# Altium PCB 60Pin_120Pin.PCBDOC
Units mm, origin at the board's own origin, x right, y up, seen from the top; angles counter-clockwise.
Board outline 10 x 54 mm, 2 copper layers (Top Layer, Bottom Layer), stack 1.621 mm thick; 3 components, 34 nets, 184 pads, 54 vias.
Unrouted connection lines stored in the file: 7.
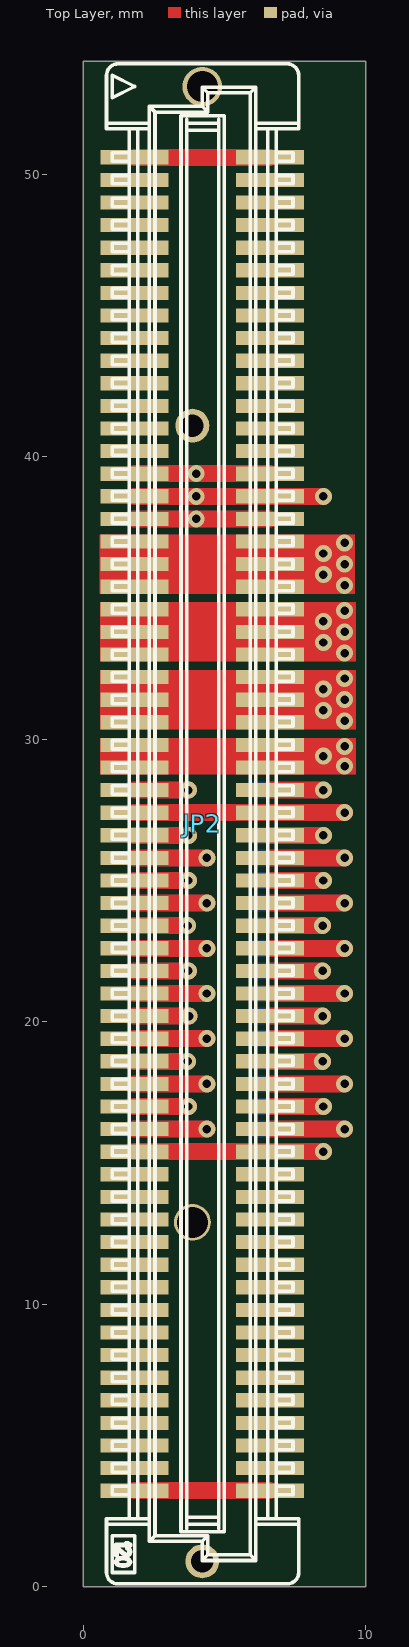
[diagram p0: Top Layer view]
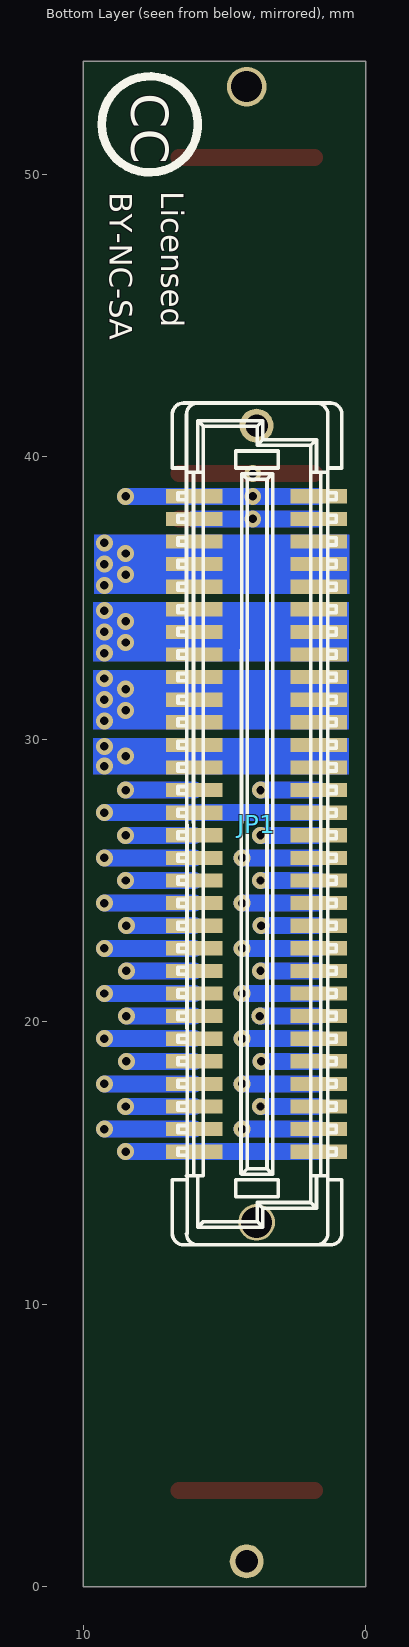
[diagram p1: Bottom Layer view, seen from below]

## Layer stack, top to bottom
Top Layer: signal copper 0.0356
Dielectric: core 1.55, FR-4, Dk 4.8
Bottom Layer: signal copper 0.0356

## Board outline
0,0 10,0 10,54 0,54

## Design rules (kind name [scope] priority, off if disabled: settings)
Clearance [All] p1: gap=0.2
ComponentClearance ComponentClearance_Bottom [OnLayer('Bottom Layer') vs OnLayer('Bottom Layer')] p1: gap=0.254 collisioncheckmode=3 verticalgap=0.254
ComponentClearance ComponentClearance_Top [OnLayer('Top Layer') vs OnLayer('Top Layer')] p2: gap=0.254 collisioncheckmode=3 verticalgap=0.254
PolygonConnect [All] p1: connectstyle=Relief reliefconductorwidth=0.254 reliefentries=4 polygonreliefangle="90 Angle"
RoomDefinition 60Pin_120Pin [InComponentClass('60Pin_120Pin')] p1 off: confinementstyle=ConfineIn formatcopy=TRUE lockcomponents=FALSE outline -50.8,-76.2 0,-76.2 0,-50.8 -50.8,-50.8
RoutingVias [All] p1: holewidth=0.3 width=0.6 viastyle="Through Hole" minholewidth=0.3 minwidth=0.6 maxholewidth=0.8 maxwidth=1.6
SolderMaskExpansion [All] p1: expansion=0.102
TestPointUsage [All] p1: valid=0 allowmultiple=FALSE
Testpoint [All] p1: side=15 testpointundercomponent=TRUE minsize=1.016 maxsize=2.54 preferedsize=1.524 minholesize=0 maxholesize=1.016 preferedholesize=0.813 testpointgrid=0.025 style=1023 order=0-112345678
Width [All] p1: maxlimit=1 minlimit=0.6 preferedwidth=0.6
18 further rules are at their usual default settings.

## Components (designator, comment, footprint, x,y, rotation, side; value= is the part's Value field where it differs from the comment)
JP1 "AMP-FH-60-Plug" AMP_FH_.8MM_60PIN_PLUG 3.865,27 r270 bottom locked
JP2 "AMP-FH-120-RECEPTABLE-H5" AMP_FH_.8MM_120PIN_R_H9_H13 4.215,27 r270 top locked
? "CC License" CC-License 7.62,51.816 r270 bottom

## Footprints (in the part's own frame and the unit in brackets; to place one, negate y for a bottom-side part, rotate by r counter-clockwise, add the part's x,y. Pads: shape width x height; smd on the part's side, far side on the other; paste and mask are expansions set on the pad)
AMP_FH_.8MM_60PIN_PLUG [mm] "AMP Free Height System, 0.8mm, 60 Pin, all Heights, Plug"
  round 1.2 hole 0.8: 0(-14.1,0)
  round 1.3 hole 1.1 mask+0: 0(14.1,0)
  rect 0.5x2 smd: 1(-11.6,2.2) 2(-11.6,-2.2) 3(-10.8,2.2) 4(-10.8,-2.2) 5(-10,2.2) 6(-10,-2.2) 7(-9.2,2.2) 8(-9.2,-2.2) 9(-8.4,2.2) 10(-8.4,-2.2) 11(-7.6,2.2) 12(-7.6,-2.2) 13(-6.8,2.2) 14(-6.8,-2.2) 15(-6,2.2) 16(-6,-2.2) 17(-5.2,2.2) 18(-5.2,-2.2) 19(-4.4,2.2) 20(-4.4,-2.2) 21(-3.6,2.2) 22(-3.6,-2.2) 23(-2.8,2.2) 24(-2.8,-2.2) 25(-2,2.2) 26(-2,-2.2) 27(-1.2,2.2) 28(-1.2,-2.2) 29(-0.4,2.2) 30(-0.4,-2.2) 31(0.4,2.2) 32(0.4,-2.2) 33(1.2,2.2) 34(1.2,-2.2) 35(2,2.2) 36(2,-2.2) 37(2.8,2.2) 38(2.8,-2.2) 39(3.6,2.2) 40(3.6,-2.2) 41(4.4,2.2) 42(4.4,-2.2) 43(5.2,2.2) 44(5.2,-2.2) 45(6,2.2) 46(6,-2.2) 47(6.8,2.2) 48(6.8,-2.2) 49(7.6,2.2) 50(7.6,-2.2) 51(8.4,2.2) 52(8.4,-2.2) 53(9.2,2.2) 54(9.2,-2.2) 55(10,2.2) 56(10,-2.2) 57(10.8,2.2) 58(10.8,-2.2) 59(11.6,2.2) 60(11.6,-2.2)
  silkscreen extent -14.9,-2.98 14.9,3.02
AMP_FH_.8MM_120PIN_R_H9_H13 [mm] "AMP Free Height System, 0.8mm, 120 Pin, 9 or 13mm Heigth, Receptacle"
  round 1.4 hole 1.1: 0(-26.1,0)
  round 1.2 hole 0.8: 0(26.1,0)
  rect 0.5x2.4 smd: 1(-23.6,-2.4) 2(-23.6,2.4) 3(-22.8,-2.4) 4(-22.8,2.4) 5(-22,-2.4) 6(-22,2.4) 7(-21.2,-2.4) 8(-21.2,2.4) 9(-20.4,-2.4) 10(-20.4,2.4) 11(-19.6,-2.4) 12(-19.6,2.4) 13(-18.8,-2.4) 14(-18.8,2.4) 15(-18,-2.4) 16(-18,2.4) 17(-17.2,-2.4) 18(-17.2,2.4) 19(-16.4,-2.4) 20(-16.4,2.4) 21(-15.6,-2.4) 22(-15.6,2.4) 23(-14.8,-2.4) 24(-14.8,2.4) 25(-14,-2.4) 26(-14,2.4) 27(-13.2,-2.4) 28(-13.2,2.4) 29(-12.4,-2.4) 30(-12.4,2.4) 31(-11.6,-2.4) 32(-11.6,2.4) 33(-10.8,-2.4) 34(-10.8,2.4) 35(-10,-2.4) 36(-10,2.4) 37(-9.2,-2.4) 38(-9.2,2.4) 39(-8.4,-2.4) 40(-8.4,2.4) 41(-7.6,-2.4) 42(-7.6,2.4) 43(-6.8,-2.4) 44(-6.8,2.4) 45(-6,-2.4) 46(-6,2.4) 47(-5.2,-2.4) 48(-5.2,2.4) 49(-4.4,-2.4) 50(-4.4,2.4) 51(-3.6,-2.4) 52(-3.6,2.4) 53(-2.8,-2.4) 54(-2.8,2.4) 55(-2,-2.4) 56(-2,2.4) 57(-1.2,-2.4) 58(-1.2,2.4) 59(-0.4,-2.4) 60(-0.4,2.4) 61(0.4,-2.4) 62(0.4,2.4) 63(1.2,-2.4) 64(1.2,2.4) 65(2,-2.4) 66(2,2.4) 67(2.8,-2.4) 68(2.8,2.4) 69(3.6,-2.4) 70(3.6,2.4) 71(4.4,-2.4) 72(4.4,2.4) 73(5.2,-2.4) 74(5.2,2.4) 75(6,-2.4) 76(6,2.4) 77(6.8,-2.4) 78(6.8,2.4) 79(7.6,-2.4) 80(7.6,2.4) 81(8.4,-2.4) 82(8.4,2.4) 83(9.2,-2.4) 84(9.2,2.4) 85(10,-2.4) 86(10,2.4) 87(10.8,-2.4) 88(10.8,2.4) 89(11.6,-2.4) 90(11.6,2.4) 91(12.4,-2.4) 92(12.4,2.4) 93(13.2,-2.4) 94(13.2,2.4) 95(14,-2.4) 96(14,2.4) 97(14.8,-2.4) 98(14.8,2.4) 99(15.6,-2.4) 100(15.6,2.4) 101(16.4,-2.4) 102(16.4,2.4) 103(17.2,-2.4) 104(17.2,2.4) 105(18,-2.4) 106(18,2.4) 107(18.8,-2.4) 108(18.8,2.4) 109(19.6,-2.4) 110(19.6,2.4) 111(20.4,-2.4) 112(20.4,2.4) 113(21.2,-2.4) 114(21.2,2.4) 115(22,-2.4) 116(22,2.4) 117(22.8,-2.4) 118(22.8,2.4) 119(23.6,-2.4) 120(23.6,2.4)
  silkscreen extent -26.91,-3.39 26.89,3.41
CC-License [mm]
  silkscreen extent -1.65,-1.73 1.75,1.67

## Part data
JP1: "AMP Free Height System, 0.8mm, 60 Pin, Plug"
JP2: library part AMP-FH-120-RECEPTABLE-H9-H13, "AMP Free Height System, 0.8mm, 120 Pin, 9 or 13mm Height, Receptable"

## Via types
v1: diameter 0.6, hole 0.3, Top Layer to Bottom Layer, tented both sides, 54 vias

## Nets (pads, with @x,y where several pads share a name; then routed paths per layer and width w, separated by ;. In a path a pad name is that pad's centre, name@x,y a point inside that pad or via, vN(x,y) a via of type N, cw(c..) or ccw(c..) an arc to the next point about the centre after c; other vN are vias at no path point)
3.3V: JP1.17 JP1.18 JP1.19 JP1.20 JP1.21 JP1.22 JP2.47 JP2.48 JP2.49 JP2.50 JP2.51 JP2.52
  other v1: 9.25,30.65 8.5,31.025 9.25,31.4 8.5,31.775 9.25,32.15
ENCODER0: JP1.32 JP2.62 | length 4.3
  Top Layer w0.6: JP2.62 v1(8.5,26.6)
  Bottom Layer w0.6: JP1.32 v1(8.5,26.6)
ENCODER1: JP1.34 JP2.64 | length 5.8
  Top Layer w0.6: JP2.64 v1(9.25,25.8)
  Bottom Layer w0.6: JP1.34 v1(9.25,25.8)
ENCODER2: JP1.36 JP2.66 | length 4.3
  Top Layer w0.6: JP2.66 v1(8.5,25)
  Bottom Layer w0.6: JP1.36 v1(8.5,25)
ENCODER3: JP1.38 JP2.68 | length 5.8
  Top Layer w0.6: JP2.68 v1(9.25,24.2)
  Bottom Layer w0.6: JP1.38 v1(9.25,24.2)
ENCODER4: JP1.40 JP2.70 | length 4.3
  Top Layer w0.6: JP2.70 v1(8.475,23.4)
  Bottom Layer w0.6: JP1.40 v1(8.475,23.4)
ENCODER5: JP1.42 JP2.72 | length 5.8
  Top Layer w0.6: JP2.72 v1(9.25,22.6)
  Bottom Layer w0.6: JP1.42 v1(9.25,22.6)
ENCODER6: JP1.44 JP2.74 | length 4.3
  Top Layer w0.6: JP2.74 v1(8.475,21.8)
  Bottom Layer w0.6: JP1.44 v1(8.475,21.8)
ENCODER7: JP1.46 JP2.76 | length 5.8
  Top Layer w0.6: JP2.76 v1(9.25,21)
  Bottom Layer w0.6: JP1.46 v1(9.25,21)
GND: JP1.3 JP1.4 JP1.11 JP1.12 JP1.13 JP1.14 JP1.15 JP1.16 JP1.23 JP1.24 JP1.25 JP1.26 JP1.29 JP1.30 JP1.59 JP1.60 JP2.1 JP2.2 JP2.29 JP2.30 JP2.33 JP2.34 JP2.41 JP2.42 JP2.43 JP2.44 JP2.45 JP2.46 JP2.53 JP2.54 JP2.55 JP2.56 JP2.59 JP2.60 JP2.89 JP2.90 JP2.119 JP2.120 | length 52.1
  Top Layer w0.6: JP2.119 JP2.120 ; JP2.89 JP2.90 v1(8.5,15.4) ; JP2.59 v1(9.25,27.4) ; JP2.33 JP2.34 ; JP2.29 JP2.30 ; JP2.1 JP2.2
  Bottom Layer w0.6: JP1.59 v1(8.5,15.4) ; JP1.29 v1(9.25,27.4) ; JP1.3 JP1.4
  other v1: 9.25,29.05 8.5,29.4 9.25,29.75 9.25,33.05 8.5,33.425 9.25,33.8 8.5,34.175 9.25,34.55 4,37.8 4,39.4
GPIO1_19: JP1.54 JP2.84 | length 5.8
  Top Layer w0.6: JP2.84 v1(9.25,17.8)
  Bottom Layer w0.6: JP1.54 v1(9.25,17.8)
GPIO1_20: JP1.55 JP2.85 | length 4
  Top Layer w0.6: JP2.85 v1(3.725,17)
  Bottom Layer w0.6: JP1.55 v1(3.725,17)
GPIO1_21: JP1.56 JP2.86 | length 4.3
  Top Layer w0.6: JP2.86 v1(8.5,17)
  Bottom Layer w0.6: JP1.56 v1(8.5,17)
GPIO1_22: JP1.57 JP2.87 | length 5.3
  Top Layer w0.6: JP2.87 v1(4.375,16.2)
  Bottom Layer w0.6: JP1.57 v1(4.375,16.2)
GPIO1_23: JP1.58 JP2.88 | length 5.8
  Top Layer w0.6: JP2.88 v1(9.25,16.2)
  Bottom Layer w0.6: JP1.58 v1(9.25,16.2)
LINESENSORCLK: JP1.52 JP2.82 | length 4.3
  Top Layer w0.6: JP2.82 v1(8.475,18.6)
  Bottom Layer w0.6: JP1.52 v1(8.475,18.6)
LINESENSORIN1: JP1.47 JP2.77 | length 4
  Top Layer w0.6: JP2.77 v1(3.75,20.2)
  Bottom Layer w0.6: JP1.47 v1(3.75,20.2)
LINESENSORIN2: JP1.49 JP2.79 | length 5.3
  Top Layer w0.6: JP2.79 v1(4.375,19.4)
  Bottom Layer w0.6: JP1.49 v1(4.375,19.4)
LINESENSOROUT1: JP1.48 JP2.78 | length 4.3
  Top Layer w0.6: JP2.78 v1(8.475,20.2)
  Bottom Layer w0.6: JP1.48 v1(8.475,20.2)
LINESENSOROUT2: JP1.50 JP2.80 | length 5.8
  Top Layer w0.6: JP2.80 v1(9.25,19.4)
  Bottom Layer w0.6: JP1.50 v1(9.25,19.4)
"LOW BATTERY": JP1.27 JP2.57 | length 4
  Top Layer w0.6: JP2.57 v1(3.725,28.2)
  Bottom Layer w0.6: JP1.27 v1(3.725,28.2)
"POWER GOOD": JP1.28 JP2.58 | length 4.3
  Top Layer w0.6: JP2.58 v1(8.5,28.2)
  Bottom Layer w0.6: JP1.28 v1(8.5,28.2)
PWM0: JP1.31 JP2.61 | length 4
  Top Layer w0.6: JP2.61 v1(3.725,26.6)
  Bottom Layer w0.6: JP1.31 v1(3.725,26.6)
PWM1: JP1.33 JP2.63 | length 5.3
  Top Layer w0.6: JP2.63 v1(4.375,25.8)
  Bottom Layer w0.6: JP1.33 v1(4.375,25.8)
PWM2: JP1.35 JP2.65 | length 4
  Top Layer w0.6: JP2.65 v1(3.725,25)
  Bottom Layer w0.6: JP1.35 v1(3.725,25)
PWM3: JP1.37 JP2.67 | length 5.3
  Top Layer w0.6: JP2.67 v1(4.375,24.2)
  Bottom Layer w0.6: JP1.37 v1(4.375,24.2)
PWM4: JP1.39 JP2.69 | length 3.9
  Top Layer w0.6: JP2.69 v1(3.7,23.4)
  Bottom Layer w0.6: JP1.39 v1(3.7,23.4)
PWM5: JP1.41 JP2.71 | length 5.3
  Top Layer w0.6: JP2.71 v1(4.375,22.6)
  Bottom Layer w0.6: JP1.41 v1(4.375,22.6)
PWM6: JP1.43 JP2.73 | length 4
  Top Layer w0.6: JP2.73 v1(3.725,21.8)
  Bottom Layer w0.6: JP1.43 v1(3.725,21.8)
PWM7: JP1.45 JP2.75 | length 5.3
  Top Layer w0.6: JP2.75 v1(4.375,21)
  Bottom Layer w0.6: JP1.45 v1(4.375,21)
SCL3V3: JP1.53 JP2.83 | length 5.3
  Top Layer w0.6: JP2.83 v1(4.375,17.8)
  Bottom Layer w0.6: JP1.53 v1(4.375,17.8)
SDA3V3: JP1.51 JP2.81 | length 3.9
  Top Layer w0.6: JP2.81 v1(3.7,18.6)
  Bottom Layer w0.6: JP1.51 v1(3.7,18.6)
VBATT: JP1.5 JP1.6 JP1.7 JP1.8 JP1.9 JP1.10 JP2.35 JP2.36 JP2.37 JP2.38 JP2.39 JP2.40
  other v1: 9.25,35.45 8.5,35.825 9.25,36.2 8.5,36.575 9.25,36.95
VBUS: JP1.1 JP1.2 JP2.31 JP2.32 | length 13.5
  Top Layer w0.6: JP2.31 v1(8.5,38.6)
  Bottom Layer w0.6: JP1.1 v1(8.5,38.6)
  other v1: 4,38.6
pads on no net: JP1.0 JP2.0 JP2.3 JP2.4 JP2.5 JP2.6 JP2.7 JP2.8 JP2.9 JP2.10 JP2.11 JP2.12 JP2.13 JP2.14 JP2.15 JP2.16 JP2.17 JP2.18 JP2.19 JP2.20 JP2.21 JP2.22 JP2.23 JP2.24 JP2.25 JP2.26 JP2.27 JP2.28 JP2.91 JP2.92 JP2.93 JP2.94 JP2.95 JP2.96 JP2.97 JP2.98 JP2.99 JP2.100 JP2.101 JP2.102 JP2.103 JP2.104 JP2.105 JP2.106 JP2.107 JP2.108 JP2.109 JP2.110 JP2.111 JP2.112 JP2.113 JP2.114 JP2.115 JP2.116 JP2.117 JP2.118

## Other copper
Top Layer:
  rectangle net GND: 0.6,28.75 9.65,30.05
  rectangle net VBATT: 0.575,35.15 9.625,37.25
  rectangle net GND: 0.6,32.75 9.65,34.85
  rectangle net 3.3V: 0.6,30.35 9.65,32.45
Bottom Layer:
  rectangle net 3.3V: 0.6,30.35 9.65,32.45
  rectangle net GND: 0.6,32.75 9.65,34.85
  rectangle net VBATT: 0.575,35.15 9.625,37.25
  rectangle net GND: 0.6,28.75 9.65,30.05

## Silkscreen, mask and mechanical layers (free items; w line width, h text height)
Mechanical 1:
  lines w0.3: 0,0 0,54 9.975,54 10,53.975 10,0 0,0

## Dimensions
0,0 to 10,0 on Mechanical 2
0,0 to 0,54 on Mechanical 2

## Text inside footprints (layer, text, board x,y; h text height)
?: Bottom Overlay "Licensed" at 7.245,49.391 h0.8 r90; Bottom Overlay "BY-NC-SA" at 9.07,49.366 h0.8 r90; Bottom Overlay "CC" at 8.295,52.866 h1.3 r90